# Altium PCB S11830_1.PcbDoc
Units mm, origin at the board's own origin, x right, y up, seen from the top; angles counter-clockwise.
Board outline 141.65 x 118 mm, 2 copper layers (Top Layer, Bottom Layer); 204 components, 97 nets, 506 pads, 72 vias.
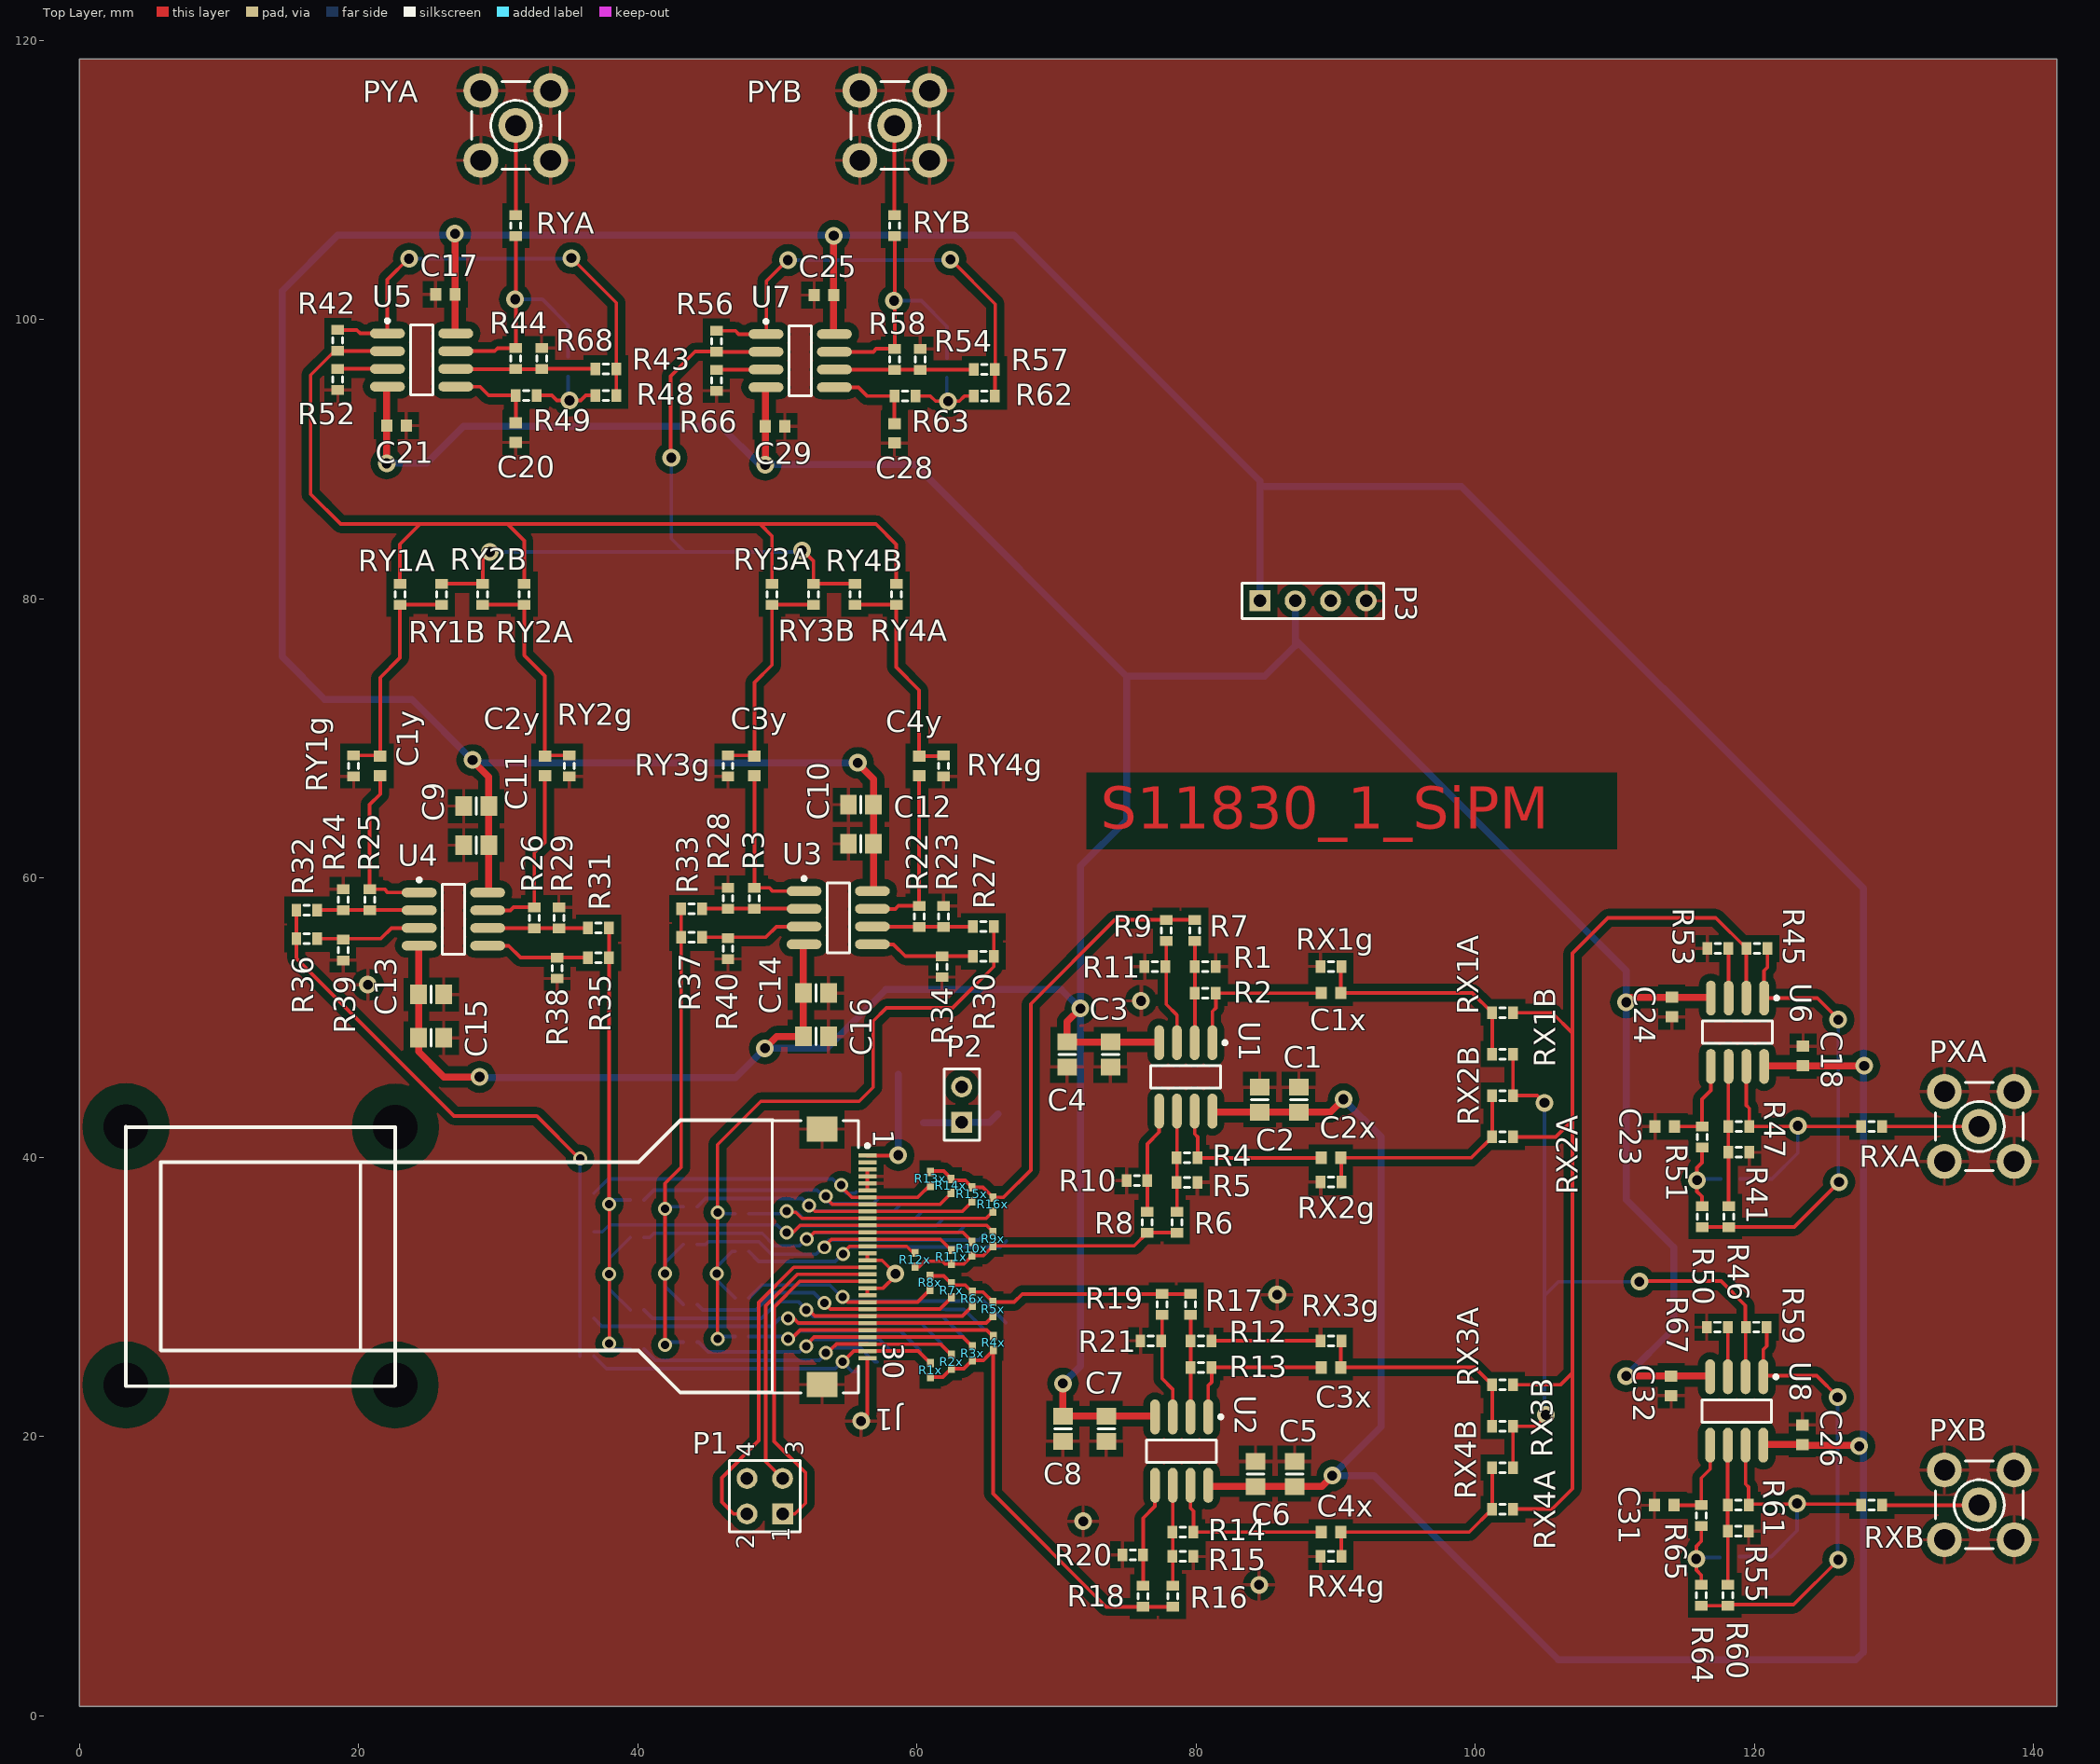
[diagram p0: Top Layer view]
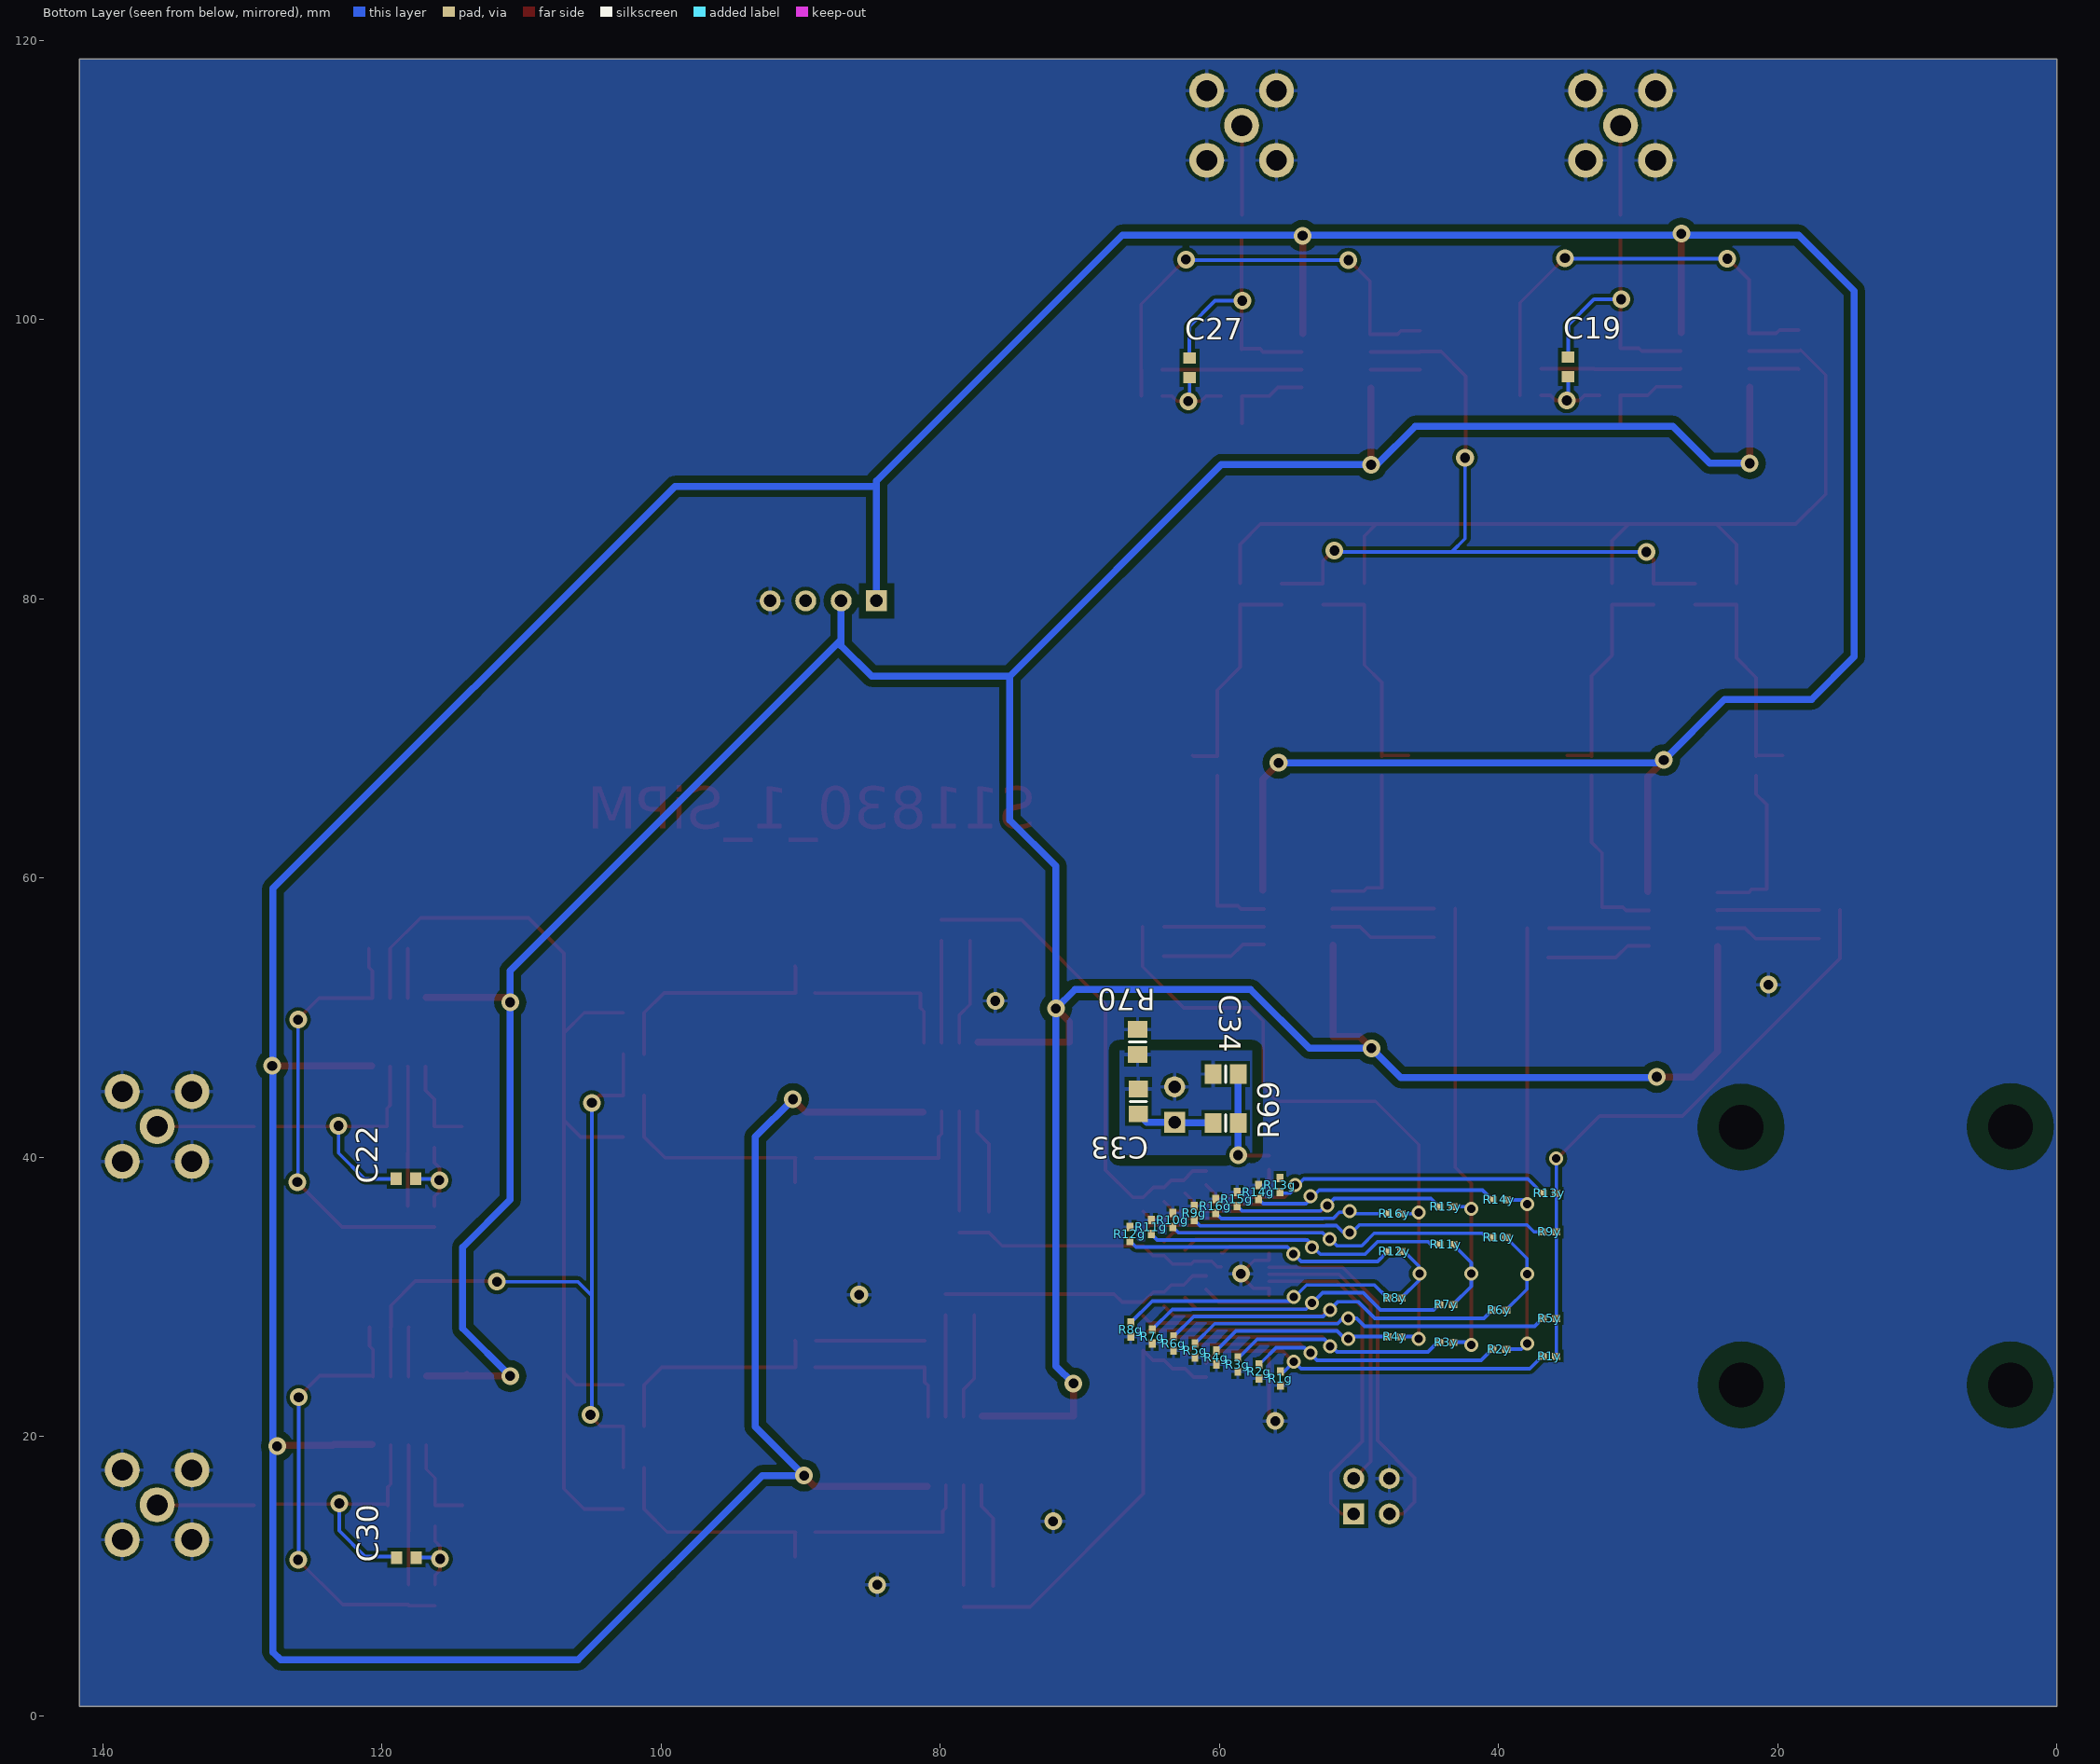
[diagram p1: Bottom Layer view, seen from below]

## Layer stack, top to bottom
Top Layer: signal copper 0.0356
Dielectric: core 0.32, FR-4, Dk 4.8
Bottom Layer: signal copper 0.0356

## Board outline
0,118.65 0,0.65 141.65,0.65 141.65,118.65 0,118.65

## Design rules (kind name [scope] priority, off if disabled: settings)
Clearance Clearance_5 [(InNamedPolygon('gnd_top') OR InNamedPolygon('gnd_bot')) vs InPadClass('Libres')] p1: gap=1.5
Clearance Clearance_4 [InNamedPolygon('gnd_top')] p2: gap=0.5
Clearance Clearance_3 [InNamedPolygon('gnd_bot') vs (InNet('-5') OR InNet('+5')OR OnLayer('Top Layer'))] p3: gap=0.5
Clearance Clearance_2 [InNamedPolygon('70_gnd_bot') vs InNamedPolygon('gnd_bot')] p4: gap=0.75
Clearance Clearance_1 [(InComponent('J1') AND (OnLayer('Bottom Layer')) OR (OnLayer('Top Layer'))OR InComponentClass('Res0402'))] p5: gap=0.2
Clearance [All] p6: gap=0.254
HoleSize HoleSize_1 [InPadClass('Libres')] p1: absolutevalues=TRUE maxlimit=5 minlimit=0.025 maxpercent=80.000 minpercent=20.000
HoleSize [All] p2: absolutevalues=TRUE maxlimit=2.54 minlimit=0.025 maxpercent=80.000 minpercent=20.000
MinimumSolderMaskSliver MinimumSolderMaskSliver_1 [(InComponentClass('Res0402') OR InComponent('J1'))] p1: minsoldermaskwidth=0.05
MinimumSolderMaskSliver [All] p2: minsoldermaskwidth=0.254
PolygonConnect [All] p1: connectstyle=Relief reliefconductorwidth=0.254 reliefentries=4 polygonreliefangle="90 Angle"
RoutingVias RoutingVias_1 [InNetClass('Undefined')] p1: holewidth=0.6 width=1 viastyle="Through Hole" minholewidth=0.6 minwidth=1 maxholewidth=0.6 maxwidth=1
RoutingVias [All] p2: holewidth=0.711 width=1.27 viastyle="Through Hole" minholewidth=0.711 minwidth=1.27 maxholewidth=0.711 maxwidth=1.27
SilkscreenOverComponentPads [All] p1: minsilkscreentomaskgap=0.254
SolderMaskExpansion SolderMaskExpansion_1 [(InComponent('J1') OR InComponentClass('Res0402')OR IsVia)] p1: expansion=0.05
SolderMaskExpansion [All] p2: expansion=0.102
Width Width_2 [InNet(GND) And OnLayer('Top Layer')] p1: maxlimit=0.254 minlimit=0.254 preferedwidth=0.254
Width Width_1 [(InNet('-5') OR InNet('+5') OR InNet('+70') OR InNet('GND')OR((InNet('+70V') AND OnLayer('Bottom Layer'))))] p2: maxlimit=0.5 minlimit=0.5 preferedwidth=0.5 minimp=50.000000 maximp=50.000000 favimp=50.000000
Width [All] p3: maxlimit=0.254 minlimit=0.254 preferedwidth=0.254
25 further rules are at their usual default settings.

## Classes and differential pairs
component class S11830_1_2: C1x C1y C2x C2y C3x C3y C4x C4y C17 C18 C19 C20 C21 C22 C23 C24 C25 C26 C27 C28 C29 C30 C31 C32 C33 C34 P1 P2 P3 PXA PXB PYA PYB R41 R42 R43 R44 R45 R46 R47 R48 R49 R50 R51 R52 R53 R54 R55 R56 R57 R58 R59 R60 R61 R62 R63 R64 R65 R66 R67 R69 R70 RX1A RX1B RX1g RX2A RX2B RX2g RX3A RX3B RX3g RX4A RX4B RX4g RXA RXB RY1A RY1B RY1g RY2A RY2B RY2g RY3A RY3B RY3g RY4A RY4B RY4g RYA RYB U5 U6 U7 U8
component class S11830_1_1: C1 C2 C3 C4 C5 C6 C7 C8 C9 C10 C11 C12 C13 C14 C15 C16 J1 R1 R1g R1x R1y R2 R2g R2x R2y R3 R3g R3x R3y R4 R4g R4x R4y R5 R5g R5x R5y R6 R6g R6x R6y R7 R7g R7x R7y R8 R8g R8x R8y R9 R9g R9x R9y R10 R10g R10x R10y R11 R11g R11x R11y R12 R12g R12x R12y R13 R13g R13x R13y R14 R14g R14x R14y R15 R15g R15x R15y R16 R16g R16x R16y R17 R18 R19 R20 R21 R22 R23 R24 R25 R26 R27 R28 R29 R30 R31 R32 R33 R34 R35 R36 R37 R38 R39 R40 U1 U2 U3 U4
net class Undefined: NetJ1_7 NetJ1_8 NetJ1_9 NetJ1_10 NetJ1_11 NetJ1_12 NetJ1_13 NetJ1_14 NetJ1_17 NetJ1_18 NetJ1_19 NetJ1_22 NetJ1_23 NetJ1_24 NetJ1_25 NetJ1_26 NetJ1_27 NetJ1_28 NetJ1_29
component class Res0402: R1g R1x R1y R2g R2x R2y R3g R3x R3y R4g R4x R4y R5g R5x R5y R6g R6x R6y R7g R7x R7y R8g R8x R8y R9g R9x R9y R10g R10x R10y R11g R11x R11y R12g R12x R12y R13g R13x R13y R14g R14x R14y R15g R15x R15y R16g R16x R16y
pad class Libres: Free-T1 Free-T2 Free-T3 Free-T4

## Components (designator, comment, footprint, x,y, rotation, side; value= is the part's Value field where it differs from the comment)
C1 "Cap" 6-0805_N 87.35,44.119 r270 top
C1x "Cap" 1608[0603] 89.65,51.765 r0 top
C1y "Cap" 1608[0603] 21.535,68.026 r90 top
C2 "Cap Pol3" 6-0805_N 84.55,44.119 r90 top
C2x "Cap" 1608[0603] 89.65,39.965 r0 top
C2y "Cap" 1608[0603] 33.335,68.026 r90 top
C3 "Cap" 6-0805_N 73.85,47.35 r90 top
C3x "Cap" 1608[0603] 89.65,24.95 r0 top
C3y "Cap" 1608[0603] 48.35,68.026 r90 top
C4 "Cap Pol3" 6-0805_N 70.75,47.35 r90 top
C4x "Cap" 1608[0603] 89.65,13.15 r0 top
C4y "Cap" 1608[0603] 60.15,68.026 r90 top
C5 "Cap" 6-0805_N 87.05,17.319 r270 top
C6 "Cap Pol3" 6-0805_N 84.25,17.319 r90 top
C7 "Cap" 6-0805_N 73.55,20.55 r90 top
C8 "Cap Pol3" 6-0805_N 70.45,20.55 r90 top
C9 "Cap" 6-0805_N 28.412,65.15 r0 top
C10 "Cap" 6-0805_N 55.981,65.25 r0 top
C11 "Cap Pol3" 6-0805_N 28.412,62.35 r180 top
C12 "Cap Pol3" 6-0805_N 55.981,62.45 r180 top
C13 "Cap" 6-0805_N 25.181,51.65 r180 top
C14 "Cap" 6-0805_N 52.75,51.75 r180 top
C15 "Cap Pol3" 6-0805_N 25.181,48.55 r180 top
C16 "Cap Pol3" 6-0805_N 52.75,48.65 r180 top
C17 "Cap" 1608[0603] 26.2,101.8 r180 top
C18 "Cap" 1608[0603] 123.475,47.25 r90 top
C19 "Cap" 1608[0603] 35,96.6 r90 bottom
C20 "Cap" 1608[0603] 31.25,91.9 r270 top
C21 "Cap" 1608[0603] 22.7,92.4 r180 top
C22 "Cap" 1608[0603] 118.275,38.45 r0 bottom
C23 "Cap" 1608[0603] 113.575,42.2 r180 top
C24 "Cap" 1608[0603] 114.075,50.75 r90 top
C25 "Cap" 1608[0603] 53.325,101.75 r180 top
C26 "Cap" 1608[0603] 123.425,20.125 r90 top
C27 "Cap" 1608[0603] 62.125,96.55 r90 bottom
C28 "Cap" 1608[0603] 58.375,91.85 r270 top
C29 "Cap" 1608[0603] 49.825,92.35 r180 top
C30 "Cap" 1608[0603] 118.225,11.325 r0 bottom
C31 "Cap" 1608[0603] 113.525,15.075 r180 top
C32 "Cap" 1608[0603] 114.025,23.625 r90 top
C33 "Cap" 6-0805_N 65.8,44 r270 bottom
C34 "Cap" 6-0805_N 59.55,45.95 r180 bottom
J1 "CL586-0556-5" FH12A-30S-0.5SH 54.816,32.869 r270 top
P1 "Header 2X2" HDR2X2 50.358,14.45 r90 top
P2 "Header 2" HDR1X2 63.2,42.5 r90 top
P3 "Header 4" HDR1X4 84.55,79.85 r0 top
PXA "SMB" SMB_V-RJ45 136.1,42.2 r0 top
PXB "SMB" SMB_V-RJ45 136.1,15.1 r0 top
PYA "SMB" SMB_V-RJ45 31.25,113.9 r0 top
PYB "SMB" SMB_V-RJ45 58.4,113.9 r0 top
R1 "Res3" J1-0603 80.65,53.65 r0 top
R1g "Res3" 0402 55.6,24.15 r90 bottom
R1x "Res3" 0402 60.95,24.75 r90 top
R1y "Res3" 0402 36.35,25.75 r0 bottom
R2 "Res3" J1-0603 80.65,51.75 r180 top
R2g "Res3" 0402 57.136,24.65 r90 bottom
R2x "Res3" 0402 62.45,25.35 r90 top
R2y "Res3" 0402 39.95,26.25 r0 bottom
R3 "Res3" J1-0603 48.35,58.55 r270 top
R3g "Res3" 0402 58.671,25.15 r90 bottom
R3x "Res3" 0402 63.95,25.95 r90 top
R3y "Res3" 0402 43.75,26.75 r0 bottom
R4 "Res3" J1-0603 79.35,38.2 r0 top
R4g "Res3" 0402 60.207,25.65 r90 bottom
R4x "Res3" 0402 65.45,26.7 r90 top
R4y "Res3" 0402 47.45,27.15 r0 bottom
R5 "Res3" J1-0603 79.35,39.95 r180 top
R5g "Res3" 0402 61.743,26.15 r90 bottom
R5x "Res3" 0402 65.441,29.119 r270 top
R5y "Res3" 0402 36.35,28.45 r0 bottom
R6 "Res3" J1-0603 78.615,35.35 r90 top
R6g "Res3" 0402 63.279,26.65 r90 bottom
R6x "Res3" 0402 63.95,29.85 r270 top
R6y "Res3" 0402 39.95,29.05 r0 bottom
R7 "Res3" J1-0603 79.9,56.25 r270 top
R7g "Res3" 0402 64.814,27.15 r90 bottom
R7x "Res3" 0402 62.45,30.45 r270 top
R7y "Res3" 0402 43.75,29.45 r0 bottom
R8 "Res3" J1-0603 76.5,35.35 r90 top
R8g "Res3" 0402 66.35,27.65 r90 bottom
R8x "Res3" 0402 60.941,31 r270 top
R8y "Res3" 0402 47.45,29.919 r0 bottom
R9 "Res3" J1-0603 77.85,56.25 r270 top
R9g "Res3" 0402 61.793,36 r270 bottom
R9x "Res3" 0402 65.441,34.15 r90 top
R9y "Res3" 0402 36.35,34.65 r0 bottom
R10 "Res3" J1-0603 75.75,38.319 r0 top
R10g "Res3" 0402 63.329,35.5 r270 bottom
R10x "Res3" 0402 63.941,33.45 r90 top
R10y "Res3" 0402 39.95,34.25 r0 bottom
R11 "Res3" J1-0603 77.05,53.65 r0 top
R11g "Res3" 0402 64.864,35 r270 bottom
R11x "Res3" 0402 62.45,32.85 r90 top
R11y "Res3" 0402 43.75,33.75 r0 bottom
R12 "Res3" J1-0603 80.35,26.85 r0 top
R12g "Res3" 0402 66.4,34.5 r270 bottom
R12x "Res3" 0402 59.85,32.65 r90 top
R12y "Res3" 0402 47.45,33.25 r0 bottom
R13 "Res3" J1-0603 80.35,24.95 r180 top
R13g "Res3" 0402 55.65,38 r270 bottom
R13x "Res3" 0402 60.95,38.45 r270 top
R13y "Res3" 0402 36.35,37.419 r180 bottom
R14 "Res3" J1-0603 79.05,11.4 r0 top
R14g "Res3" 0402 57.186,37.5 r270 bottom
R14x "Res3" 0402 62.441,37.95 r270 top
R14y "Res3" 0402 39.95,36.95 r0 bottom
R15 "Res3" J1-0603 79.05,13.15 r180 top
R15g "Res3" 0402 58.721,37 r270 bottom
R15x "Res3" 0402 63.941,37.35 r270 top
R15y "Res3" 0402 43.75,36.45 r0 bottom
R16 "Res3" J1-0603 78.315,8.55 r90 top
R16g "Res3" 0402 60.257,36.5 r270 bottom
R16x "Res3" 0402 65.441,36.619 r270 top
R16y "Res3" 0402 47.45,35.95 r0 bottom
R17 "Res3" J1-0603 79.6,29.45 r270 top
R18 "Res3" J1-0603 76.2,8.55 r90 top
R19 "Res3" J1-0603 77.55,29.45 r270 top
R20 "Res3" J1-0603 75.45,11.519 r0 top
R21 "Res3" J1-0603 76.75,26.85 r0 top
R22 "Res3" J1-0603 61.9,57.25 r90 top
R23 "Res3" J1-0603 60.15,57.25 r270 top
R24 "Res3" J1-0603 18.881,58.45 r90 top
R25 "Res3" J1-0603 20.781,58.45 r270 top
R26 "Res3" J1-0603 34.331,57.15 r90 top
R27 "Res3" J1-0603 64.75,56.515 r180 top
R28 "Res3" J1-0603 46.45,58.55 r90 top
R29 "Res3" J1-0603 32.581,57.15 r270 top
R30 "Res3" J1-0603 64.75,54.4 r180 top
R31 "Res3" J1-0603 37.181,56.415 r180 top
R32 "Res3" J1-0603 16.281,57.7 r0 top
R33 "Res3" J1-0603 43.85,57.8 r0 top
R34 "Res3" J1-0603 61.781,53.65 r90 top
R35 "Res3" J1-0603 37.181,54.3 r180 top
R36 "Res3" J1-0603 16.281,55.65 r0 top
R37 "Res3" J1-0603 43.85,55.75 r0 top
R38 "Res3" J1-0603 34.212,53.55 r90 top
R39 "Res3" J1-0603 18.881,54.85 r90 top
R40 "Res3" J1-0603 46.45,54.95 r90 top
R41 "Res3" J1-0603 118.875,40.35 r0 top
R42 "Res3" J1-0603 18.5,98.5 r270 top
R43 "Res3" J1-0603 37.7,96.465 r0 top
R44 "Res3" J1-0603 31.25,97.2 r270 top
R45 "Res3" J1-0603 120.175,54.95 r180 top
R46 "Res3" J1-0603 118.14,35.75 r270 top
R47 "Res3" J1-0603 118.875,42.2 r180 top
R48 "Res3" J1-0603 37.7,94.565 r0 top
R49 "Res3" J1-0603 32,94.565 r0 top
R50 "Res3" J1-0603 116.24,35.75 r270 top
R51 "Res3" J1-0603 116.24,41.45 r270 top
R52 "Res3" J1-0603 18.5,95.7 r270 top
R53 "Res3" J1-0603 117.375,54.95 r180 top
R54 "Res3" J1-0603 60.225,97.15 r90 top
R55 "Res3" J1-0603 118.825,13.225 r0 top
R56 "Res3" J1-0603 45.625,98.45 r270 top
R57 "Res3" J1-0603 64.825,96.415 r0 top
R58 "Res3" J1-0603 58.375,97.15 r270 top
R59 "Res3" J1-0603 120.125,27.825 r180 top
R60 "Res3" J1-0603 118.09,8.625 r270 top
R61 "Res3" J1-0603 118.825,15.075 r180 top
R62 "Res3" J1-0603 64.825,94.515 r0 top
R63 "Res3" J1-0603 59.125,94.515 r0 top
R64 "Res3" J1-0603 116.19,8.625 r270 top
R65 "Res3" J1-0603 116.19,14.325 r270 top
R66 "Res3" J1-0603 45.625,95.65 r270 top
R67 "Res3" J1-0603 117.325,27.825 r180 top
R68 "Res3" J1-0603 33.1,97.2 r90 top
R69 "Res3" 6-0805_N 59.55,42.45 r0 bottom
R70 "Res3" 6-0805_N 65.85,48.25 r270 bottom
RX1A "Res3" J1-0603 101.95,50.35 r180 top
RX1B "Res3" J1-0603 101.95,47.383 r180 top
RX1g "Res3" J1-0603 89.65,53.665 r0 top
RX2A "Res3" J1-0603 101.95,41.45 r180 top
RX2B "Res3" J1-0603 101.95,44.417 r180 top
RX2g "Res3" J1-0603 89.65,38.215 r0 top
RX3A "Res3" J1-0603 101.95,23.695 r180 top
RX3B "Res3" J1-0603 101.95,20.728 r180 top
RX3g "Res3" J1-0603 89.65,26.85 r0 top
RX4A "Res3" J1-0603 101.95,14.795 r180 top
RX4B "Res3" J1-0603 101.95,17.762 r180 top
RX4g "Res3" J1-0603 89.65,11.4 r0 top
RXA "Res3" J1-0603 128.4,42.2 r180 top
RXB "Res3" J1-0603 128.4,15.075 r180 top
RY1A "Res3" J1-0603 22.95,80.326 r270 top
RY1B "Res3" J1-0603 25.917,80.326 r270 top
RY1g "Res3" J1-0603 19.635,68.026 r90 top
RY2A "Res3" J1-0603 31.85,80.326 r270 top
RY2B "Res3" J1-0603 28.883,80.326 r270 top
RY2g "Res3" J1-0603 35.085,68.026 r90 top
RY3A "Res3" J1-0603 49.605,80.326 r270 top
RY3B "Res3" J1-0603 52.572,80.326 r270 top
RY3g "Res3" J1-0603 46.45,68.026 r90 top
RY4A "Res3" J1-0603 58.505,80.326 r270 top
RY4B "Res3" J1-0603 55.538,80.326 r270 top
RY4g "Res3" J1-0603 61.9,68.026 r90 top
RYA "Res3" J1-0603 31.25,106.725 r270 top
RYB "Res3" J1-0603 58.375,106.725 r270 top
U1 "AD8002" SO-8_M 79.25,45.75 r270 top
U2 "AD8002" SO-8_M 78.95,18.95 r270 top
U3 "AD8002" SO-8_M 54.35,57.15 r0 top (schematic designator U1)
U4 "AD8002" SO-8_M 26.781,57.05 r0 top
U5 "AD8056ARM" SO8_M 24.5,97.1 r0 top
U6 "AD8056ARM" SO8_M 118.775,48.95 r270 top
U7 "AD8056ARM" SO8_M 51.625,97.05 r0 top
U8 "AD8056ARM" SO8_M 118.725,21.825 r270 top

## Footprints (in the part's own frame and the unit in brackets; to place one, negate y for a bottom-side part, rotate by r counter-clockwise, add the part's x,y. Pads: shape width x height; smd on the part's side, far side on the other; paste and mask are expansions set on the pad)
6-0805_N [mm] "Chip Resistor, Body 2.0x1.2mm, IPC Medium Density"
  rect 1.2x1.4 smd: 1(-0.9,0) 2(0.9,0)
  silkscreen extent 0,-0.6 0,0.6, body extent -1.07,-0.7 1.07,0.7, height 0.7
0402 [mm] "Chip Capacitor, Body 1.0x0.5mm, IPC High Density"
  rect 0.6x0.5 smd: 1(-0.5,0) 2(0.5,0)
  body extent -0.55,-0.3 0.55,0.3, height 1.3
1608[0603] [mm] "Chip Capacitor, Body 1.6x0.8mm, IPC High Density"
  rect 0.8x0.9 smd: 1(-0.7,0) 2(0.7,0)
  body extent -0.87,-0.48 0.87,0.48, height 1.3
FH12A-30S-0.5SH [mm] "Connector; FH12 Series; 30 Position; 0.5mm Spaced Top Contact"
  rect 0.3x1.3 smd: 1(-7.25,1.625) 2(-6.75,1.625) 3(-6.25,1.625) 4(-5.75,1.625) 5(-5.25,1.625) 6(-4.75,1.625) 7(-4.25,1.625) 8(-3.75,1.625) 9(-3.25,1.625) 10(-2.75,1.625) 11(-2.25,1.625) 12(-1.75,1.625) 13(-1.25,1.625) 14(-0.75,1.625) 15(-0.25,1.625) 16(0.25,1.625) 17(0.75,1.625) 18(1.25,1.625) 19(1.75,1.625) 20(2.25,1.625) 21(2.75,1.625) 22(3.25,1.625) 23(3.75,1.625) 24(4.25,1.625) 25(4.75,1.625) 26(5.25,1.625) 27(5.75,1.625) 28(6.25,1.625) 29(6.75,1.625) 30(7.25,1.625)
  rect 1.8x2.2 smd: 31(-9.15,-1.625) 32(9.15,-1.625)
  silkscreen extent -9.75,-5.2 9.75,1.75
HDR1X2 [mm] "Connector; Header; 2 Position"
  rect 1.5x1.5 hole 0.9: 1(0,0)
  round 1.5 hole 0.9: 2(2.54,0)
  silkscreen extent -1.27,-1.27 3.81,1.27
HDR1X4 [mm] "Connector; Header; 4 Position"
  rect 1.5x1.5 hole 0.9: 1(0,0)
  round 1.5 hole 0.9: 2(2.54,0) 3(5.08,0) 4(7.62,0)
  silkscreen extent -1.27,-1.27 8.89,1.27
HDR2X2 [mm] "Connector; Header; 2x2 Position"
  rect 1.5x1.5 hole 0.9: 1(0,0)
  round 1.5 hole 0.9: 2(0,2.54) 3(2.54,0) 4(2.54,2.54)
  silkscreen extent -1.27,-1.27 3.81,3.81
J1-0603 [mm] "Chip Resistor, Body 1.6x0.8mm, IPC High Density"
  rect 0.7x0.9 smd: 1(-0.75,0) 2(0.75,0)
  silkscreen extent -0.2,-0.35 0.2,0.35, body extent -0.85,-0.48 0.85,0.48, height 0.9
SMB_V-RJ45 [mm] "Connector; SMB Straight"
  round 2.5 hole 1.5: 1(0,0) 2(-2.5,-2.5) 2(-2.5,2.5) 2(2.5,-2.5) 2(2.5,2.5)
  silkscreen extent -3.15,-3.15 3.15,3.15
SO8_M [mm] "SOIC, 8-Leads, Body 4.9x3.9mm, Pitch 1.27mm, IPC Low Density"
  oval 2.5x0.7 smd: 1(-2.45,1.905) 2(-2.45,0.635) 3(-2.45,-0.635) 4(-2.45,-1.905) 5(2.45,-1.905) 6(2.45,-0.635) 7(2.45,0.635) 8(2.45,1.905)
  silkscreen extent -2.57,-2.5 0.8,2.93, body extent -2,-2.5 2,2.5, height 1.75
SO-8_M [mm] "SOIC, 8-Leads, Body 4.9x3.9mm, Pitch 1.27mm, IPC Low Density"
  oval 2.5x0.7 smd: 1(-2.45,1.905) 2(-2.45,0.635) 3(-2.45,-0.635) 4(-2.45,-1.905) 5(2.45,-1.905) 6(2.45,-0.635) 7(2.45,0.635) 8(2.45,1.905)
  silkscreen extent -2.57,-2.5 0.8,2.93, body extent -2,-2.5 2,2.5, height 1.75

## Part data
C1 C1x C1y C2x C2y C3 C3x C3y C4x C4y C5 C7 C9 C10 C13 C14 C17 C18 C19 C20 C21 C22 C23 C24 C25 C26 C27 C28 C29 C30 C31 C32 C33 C34: "Capacitor"
C2 C4 C6 C8 C11 C12 C15 C16: "Polarized Capacitor (Surface Mount)"
J1: "FH12 Series, \"Flip-Lock\" SMT/ZIF FFC/FPC Connector - 0.5mm Spaced Top Contact"
P1: "Header, 2-Pin, Dual row"
P2: "Header, 2-Pin"
P3: "Header, 4-Pin"
PXA PXB PYA PYB: "SMB Straight Connector"
R1 R1g R1x R1y R2 R2g R2x R2y R3 R3g R3x R3y R4 R4g R4x R4y R5 R5g R5x R5y R6 R6g R6x R6y R7 R7g R7x R7y R8 R8g R8x R8y R9 R9g R9x R9y R10 R10g R10x R10y R11 R11g R11x R11y R12 R12g R12x R12y R13 R13g R13x R13y R14 R14g R14x R14y R15 R15g R15x R15y R16 R16g R16x R16y R17 R18 R19 R20 R21 R22 R23 R24 R25 R26 R27 R28 R29 R30 R31 R32 R33 R34 R35 R36 R37 R38 R39 R40 R41 R42 R43 R44 R45 R46 R47 R48 R49 R50 R51 R52 R53 R54 R55 R56 R57 R58 R59 R60 R61 R62 R63 R64 R65 R66 R67 R68 R69 R70 RX1A RX1B RX1g RX2A RX2B RX2g RX3A RX3B RX3g RX4A RX4B RX4g RXA RXB RY1A RY1B RY1g RY2A RY2B RY2g RY3A RY3B RY3g RY4A RY4B RY4g RYA RYB: "Resistor"
U1 U2 U3 U4: library part AD8002AR, "Dual 600MHz, 50mW Current Feedback Amplifier"
U5 U6 U7 U8: "Low Cost, 300MHz Voltage Feedback Amplifier"

## Free pads (board coordinates)
  round 1.524 hole 3.2 unplated: T1(22.6,23.685) T2(22.616,42.15) T3(3.316,42.185) T4(3.316,23.685)

## Via types
v1: diameter 1.27, hole 0.711, Top Layer to Bottom Layer, 46 vias
v2: diameter 1, hole 0.6, Top Layer to Bottom Layer, 26 vias

## Nets (pads, with @x,y where several pads share a name; then routed paths per layer and width w, separated by ;. In a path a pad name is that pad's centre, name@x,y a point inside that pad or via, vN(x,y) a via of type N, cw(c..) or ccw(c..) an arc to the next point about the centre after c; other vN are vias at no path point)
70_GND: C33.1 C34.1 P2.2 R70.2
+5: C1.2 C2.1 C5.2 C6.1 C9.2 C10.2 C11.1 C12.1 C17.1 C18.1 C25.1 C26.1 P3.1 U1.8 U2.8 U3.8 U4.8 U5.8 U6.8 U7.8 U8.8 | length 407.2
  Top Layer w0.5: U5.8@26.9,99.055 C17.1 v1@26.9,106.1 ; v1@28.15,68.4 29.312,67.238 C9.2 C11.1 U4.8@29.312,59.036 ; U7.8@54.025,99.005 C25.1 v1(54.025,106) ; v1@55.75,68.2 56.881,67.069 C10.2 C12.1 U3.8@56.881,59.136 ; U2.8@80.936,16.419 C6.1 C5.2 89.019,16.419 v1@89.75,17.15 ; U1.8@81.236,43.219 C2.1 C1.2 89.619,43.219 v1(90.55,44.15) ; U8.8@120.68,19.425 C26.1 123.49,19.36 v1@127.15,19.36 ; U6.8@120.73,46.55 C18.1 v1(127.85,46.55)
  Bottom Layer w0.5: v1(55.75,68.25) 28.35,68.25 23.8,72.8 17.55,72.8 14.5,75.85 14.5,102.05 18.5,106.05 66.95,106.05 84.55,88.45 84.55,88.05 ; P3.1 84.55,88.05 ; v1(90.55,44.15) 93.25,41.45 93.25,20.7 v1(89.75,17.2) 92.75,17.2 105.95,4 127.25,4 127.8,4.55 127.8,59.25 99,88.05 84.55,88.05
  other v1: 127.5,19.3 28.15,68.45 26.9,106.15
+70: C33.2 P2.1 R69.2 | length 5.5
  Bottom Layer w0.5: R69.2 P2.1@63.15,42.45 ; P2.1 65.2,42.5 C33.2
+70V: C34.2 J1.1 R69.1 | length 8
  Top Layer w0.254: J1.1 58.619,40.119 v1(58.65,40.15)
  Bottom Layer w0.5: v1(58.65,40.15) R69.1 C34.2
-5: C3.2 C4.2 C7.2 C8.2 C13.2 C14.2 C15.2 C16.2 C21.2 C24.2 C29.2 C32.2 P3.2 U1.4 U2.4 U3.4 U4.4 U5.4 U6.4 U7.4 U8.4 | length 306.1
  Top Layer w0.5: v1@22,89.6 C21.2 U5.4@22,95.145 ; U4.4@24.281,55.095 C13.2 C15.2 24.281,47.579 26.109,45.75 v1(28.65,45.75) ; v1(49.1,47.8) 49.95,48.65 C16.2 C14.2 U3.4@51.85,55.195 ; v1@49.125,89.55 v1(49.125,89.6) C29.2 U7.4@49.125,95.095 ; v1@70.45,23.75 C8.2 C7.2 U2.4@76.995,21.45 ; v1(71.7,50.65) 70.75,49.7 C4.2 C3.2 U1.4@77.295,48.25 ; v1(110.8,24.325) C32.2 ; v1(110.8,51.1) 110.8,51.45 C24.2 U6.4@116.82,51.45 ; C32.2@113.9,24.45 C32.2 ; U8.4@116.77,24.325 C32.2
  Bottom Layer w0.5: v1(22,89.7) 24.85,89.7 27.5,92.35 45.95,92.35 48.7,89.6 v1(49.125,89.6) 59.85,89.6 75,74.45 ; v1@28.5,45.85 28.55,45.85 28.7,45.7 47,45.7 v1(49.1,47.8) 53.55,47.8 57.75,52 70.35,52 v1(71.7,50.65) ; v1(70.45,23.8) 71.7,25.05 v1(71.7,50.65) ; P3.2 87.09,77.05 ; v1(110.8,24.325) 114.2,27.725 114.2,33.55 110.8,36.95 v1(110.8,51.1) 110.8,53.34 87.09,77.05 ; v1(71.7,50.65) 71.7,60.85 75,64.15 75,74.45 ; 75,74.45 84.9,74.45 87.09,76.64 87.09,77.05
GND: C1.1 C2.2 C3.1 C4.1 C5.1 C6.2 C7.1 C8.1 C9.1 C10.1 C11.2 C12.2 C13.1 C14.1 C15.1 C16.1 C17.2 C18.2 C20.2 C21.1 C23.2 C24.1 C25.2 C26.2 C28.2 C29.1 C31.2 C32.1 J1.3 J1.4 J1.5 J1.6 J1.15 J1.16 J1.20 J1.21 J1.30 J1.31 J1.32 P1.4 P3.4 PXA.2 PXB.2 PYA.2 PYB.2 R1.2 R1g.1 R2g.1 R3g.1 R4.2 R4g.1 R5g.1 R6g.1 R7g.1 R8g.1 R9g.1 R10.1 R10g.1 R11.1 R11g.1 R12.2 R12g.1 R14.2 R14g.1 R15g.1 R16g.1 R20.1 R21.1 R22.2 R24.2 R26.2 R28.2 R34.1 R38.1 R39.1 R40.1 R41.2 R52.2 R53.2 R54.2 R55.2 R66.2 R67.2 R68.2 R70.1 RX1g.1 RX2g.1 RX3g.1 RX4g.1 RY1g.1 RY2g.1 RY3g.1 RY4g.1 | length 19.9
  Top Layer w0.254: v1(55.989,21.1) 56.441,21.552 J1.30 ; J1.21 J1.20 57.569,30.619 58.45,31.5 v1(58.45,31.65) 57.481,32.619 J1.16 J1.15 ; J1.6 J1.5 J1.4 J1.3 ; R12.2 RX3g.1
  other v1: 84.5,9.375 71.9,13.922 85.8,30.15 76.048,51.2 20.65,52.35
NetC1x_1: C1x.1 R2.1 U1.1 | length 11.2
  Top Layer w0.254: U1.1 81.155,50.45 81.4,50.695 R2.1 88.935,51.75 C1x.1
NetC1x_2: C1x.2 RX1A.2 RX1B.2 RX1g.2 | length 16.3
  Top Layer w0.254: RX1g.2 90.35,53.615 C1x.2 99.785,51.765 RX1A.2 RX1B.2
NetC1y_1: C1y.1 R25.1 U4.1 | length 12.1
  Top Layer w0.254: C1y.1 21.535,66.01 20.781,65.256 R25.1 21.836,59.2 22.081,58.955 U4.1
NetC1y_2: C1y.2 RY1A.2 RY1B.2 RY1g.2 | length 16.3
  Top Layer w0.254: RY1g.2 C1y.2@21.485,68.776 ; C1y.2 21.535,74.35 22.95,75.765 RY1A.2 RY1B.2
NetC2x_1: C2x.1 R5.1 U1.7 | length 12.3
  Top Layer w0.254: U1.7 79.885,41.665 80.1,41.45 R5.1 C2x.1@88.935,39.95
NetC2x_2: C2x.2 RX2A.2 RX2B.2 RX2g.2 | length 16.2
  Top Layer w0.254: RX2g.2 90.4,39.915 C2x.2 99.715,39.965 RX2A.2 RX2B.2
NetC2y_1: C2y.1 R29.1 U4.7 | length 13.2
  Top Layer w0.254: U4.7 30.866,57.685 31.081,57.9 R29.1 32.581,61.8 33.335,62.554 C2y.1
NetC2y_2: C2y.2 RY2A.2 RY2B.2 RY2g.2 | length 16.2
  Top Layer w0.254: RY2B.2 RY2A.2 31.85,75.95 33.335,74.465 C2y.2 33.385,68.776 RY2g.2
NetC3x_1: C3x.1 R13.1 U2.1 | length 11.5
  Top Layer w0.254: U2.1 80.855,23.65 81.1,23.895 R13.1 C3x.1
NetC3x_2: C3x.2 RX3A.2 RX3B.2 RX3g.2 | length 16.3
  Top Layer w0.254: RX3g.2 90.35,26.8 C3x.2 99.945,24.95 RX3A.2 RX3B.2
NetC3y_1: C3y.1 R3.1 U3.1 | length 11.7
  Top Layer w0.254: C3y.1 R3.1 49.405,59.3 49.65,59.055 U3.1
NetC3y_2: C3y.2 RY3A.2 RY3B.2 RY3g.2 | length 16.2
  Top Layer w0.254: RY3g.2 C3y.2@48.3,68.776 ; C3y.2 48.35,74 49.605,75.255 RY3A.2 RY3B.2
NetC4x_1: C4x.1 R15.1 U2.7 | length 12.6
  Top Layer w0.254: U2.7 79.585,14.865 79.8,14.65 R15.1 C4x.1
NetC4x_2: C4x.2 RX4A.2 RX4B.2 RX4g.2 | length 16.3
  Top Layer w0.254: RX4g.2 90.4,13.1 C4x.2 99.555,13.15 RX4A.2 RX4B.2
NetC4y_1: C4y.1 R23.1 U3.7 | length 12.8
  Top Layer w0.254: U3.7 58.435,57.785 58.65,58 R23.1 C4y.1
NetC4y_2: C4y.2 RY4A.2 RY4B.2 RY4g.2 | length 16.3
  Top Layer w0.254: RY4B.2 RY4A.2 58.505,75.095 60.15,73.45 C4y.2 61.85,68.726 RY4g.2
NetC19_1: C19.1 R48.1 R49.2 | length 6.1
  Top Layer w0.254: R49.2 33.835,94.565 34.2,94.2 v1(35.1,94.2) 35.9,94.2 36.265,94.565 R48.1
  Bottom Layer w0.254: v1@35,94.3 C19.1
NetC19_2: C19.2 R44.1 RYA.2 U5.7 | length 19.3
  Top Layer w0.254: U5.7 29.735,97.735 29.95,97.95 R44.1 ; R44.1@31.25,97.975 RYA.2@31.25,106
  Bottom Layer w0.254: v1(31.2,101.45) 33.15,101.45 35,99.6 C19.2@35,97.325
NetC20_1: C20.1 R49.1 U5.5 | length 6.5
  Top Layer w0.254: U5.5 28.67,95.195 29.3,94.565 R49.1 C20.1
NetC22_1: C22.1 R50.1 R51.2 | length 6.1
  Top Layer w0.254: R50.1 116.24,37.185 115.875,37.55 v1(115.875,38.35) 115.875,39.25 116.24,39.615 R51.2
  Bottom Layer w0.254: v1@115.975,38.45 C22.1
NetC22_2: C22.2 R47.1 RXA.2 U6.7 | length 19.3
  Top Layer w0.254: U6.7 119.41,43.715 119.625,43.5 R47.1 RXA.2
  Bottom Layer w0.254: C22.2 121.25,38.45 123.1,40.3 v1(123.1,42.25)
NetC23_1: C23.1 R51.1 U6.5 | length 6.5
  Top Layer w0.254: C23.1 R51.1 116.24,44.15 116.87,44.78 U6.5
NetC27_1: C27.1 R62.1 R63.2 | length 6.1
  Top Layer w0.254: R63.2 60.96,94.515 61.325,94.15 v1(62.225,94.15) 63.025,94.15 63.39,94.515 R62.1
  Bottom Layer w0.254: v1@62.125,94.25 C27.1
NetC27_2: C27.2 R58.1 RYB.2 U7.7 | length 19.3
  Top Layer w0.254: U7.7 56.86,97.685 57.075,97.9 R58.1 ; R58.1@58.4,97.875 RYB.2@58.4,105.9
  Bottom Layer w0.254: v1(58.35,101.35) 60.3,101.35 62.15,99.5 C27.2@62.15,97.225
NetC28_1: C28.1 R63.1 U7.5 | length 6.5
  Top Layer w0.254: U7.5 55.795,95.145 56.425,94.515 R63.1 C28.1
NetC30_1: C30.1 R64.1 R65.2 | length 6.1
  Top Layer w0.254: R64.1 116.19,10.06 115.825,10.425 v1(115.825,11.225) 115.825,12.125 116.19,12.49 R65.2
  Bottom Layer w0.254: v1@115.925,11.325 C30.1
NetC30_2: C30.2 R61.1 RXB.2 U8.7 | length 19.3
  Top Layer w0.254: U8.7 119.36,16.59 119.575,16.375 R61.1 ; R61.1@119.575,15.15 RXB.2@127.6,15.15
  Bottom Layer w0.254: C30.2@118.925,11.4 121.2,11.4 123.05,13.25 v1(123.05,15.2)
NetC31_1: C31.1 R65.1 U8.5 | length 6.5
  Top Layer w0.254: C31.1 R65.1 116.19,17.025 116.82,17.655 U8.5
NetJ1_7: J1.7 R13g.2 R13x.2 R13y.1 | length 27
  Top Layer w0.254: v2(54.569,38.019) 54.5,37.95 55.331,37.119 J1.7 60.041,37.119 R13x.2@60.941,38.019
  Bottom Layer w0.254: R13y.1 37.881,38.45 53.95,38.45 54.45,37.95 54.45,37.9 54.931,37.419 55.569,37.419 R13g.2
NetJ1_8: J1.8 R14g.2 R14x.2 R14y.2 | length 26.9
  Top Layer w0.254: v2@53.378,36.922 53.628,36.922 53.931,36.619 J1.8 61.641,36.619 R14x.2@62.441,37.419
  Bottom Layer w0.254: R14y.2 41.15,37.65 52.84,37.65 v2@53.416,37.074 ; v2@53.46,36.84 53.61,36.84 53.781,36.669 56.855,36.669 R14g.2
  other v2: 53.45,37.2
NetJ1_9: J1.9 R15g.2 R15x.2 R15y.2 | length 27.5
  Top Layer w0.254: v2(52.25,36.554) 52.25,36.55 52.2,36.5 52.25,36.45 52.35,36.45 52.681,36.119 J1.9 63.241,36.119 R15x.2@63.941,36.819
  Bottom Layer w0.254: R15y.2 44.831,37.031 51.769,37.031 52.35,36.45 52.45,36.45 52.739,36.161 58.382,36.161 R15g.2
NetJ1_10: J1.10 R16g.2 R16x.2 R16y.2 | length 28.1
  Top Layer w0.254: v2(50.65,36.15) 50.75,36.05 51.307,36.05 51.738,35.619 J1.10 64.941,35.619 R16x.2
  Bottom Layer w0.254: R16y.2 v2@50.85,35.95 ; v2(50.65,36.15) 50.75,36.05 51.404,36.05 51.835,35.619 52.565,35.619 52.584,35.6 59.857,35.6 R16g.2
NetJ1_11: J1.11 R9g.2 R9x.2 R9y.2 | length 40.4
  Top Layer w0.254: 51.15,34.65 51.619,35.119 J1.11 64.981,35.119 R9x.2@65.45,34.65
  Bottom Layer w0.254: R9y.2 37.45,34.65 37.95,35.15 49.95,35.15 50.45,34.65 51.15,34.65 51.611,35.111 52.355,35.111 52.374,35.092 61.385,35.092 R9g.2
  other v2: 50.65,34.6
NetJ1_12: J1.12 R10g.2 R10x.2 R10y.2 | length 36.5
  Top Layer w0.254: v2(52.1,34.146) 52.146,34.146 52.619,34.619 J1.12 63.281,34.619 R10x.2@63.95,33.95
  Bottom Layer w0.254: R10y.2 40.85,34.25 41.15,34.55 48.9,34.55 49.8,33.65 51.55,33.65 52.15,34.25 v2@52.25,34.25 ; v2(52.1,34.146) 52.146,34.146 v2@52.25,34.25 ; R10g.2 62.913,34.584 52.584,34.584 v2@52.25,34.25
NetJ1_13: J1.13 R11g.2 R11x.2 R11y.2 | length 31.5
  Top Layer w0.254: v2@53.35,33.75 53.493,33.75 53.862,34.119 J1.13 61.681,34.119 R11x.2
  Bottom Layer w0.254: R11y.2 44.85,33.75 45.05,33.95 48.65,33.95 49.55,33.05 52.75,33.05 53.35,33.65 v2@53.35,33.75 ; v2@53.196,33.596 v2@53.35,33.75 ; R11g.2 64.44,34.076 53.676,34.076 v2@53.35,33.75
  other v2: 53.378,33.55
NetJ1_14: J1.14 R12g.2 R12x.2 R12y.2 | length 25.8
  Top Layer w0.254: v2@54.45,33.25 54.45,32.9 55.169,33.619 J1.14 59.25,33.619 59.719,33.15 R12x.2
  Bottom Layer w0.254: R12y.2 48.658,32.542 54.125,32.542 54.395,32.812 v2@54.395,33.25 ; v2@54.45,33.25 54.8,33.25 55.118,33.568 65.968,33.568 R12g.2
  other v2: 54.7,33.059
NetJ1_17: J1.17 P1.2 | length 26.4
  Top Layer w0.254: P1.2 46.858,14.45 46.008,15.3 46.008,17.05 48.658,19.7 48.658,29.6 ; 48.654,29.604 51.169,32.119 J1.17
NetJ1_18: J1.18 P1.3 | length 21.1
  Top Layer w0.254: P1.3 49.158,18.19 49.158,29.369 51.419,31.619 J1.18
NetJ1_19: J1.19 P1.1 | length 24.4
  Top Layer w0.254: 49.746,29.254 51.611,31.119 J1.19 ; 49.758,29.25 49.758,19.65 52.008,17.4 52.008,15.219 51.239,14.45 P1.1
NetJ1_22: J1.22 R8g.2 R8x.2 R8y.2 | length 27
  Top Layer w0.254: v2(54.65,30) 55.031,29.619 J1.22 60.041,29.619 R8x.2@60.941,30.519
  Bottom Layer w0.254: R8y.2 48.881,30.85 53.75,30.85 54.9,29.7 64.8,29.7 R8g.2 ; v2@54.7,29.919 v2@54.919,29.7
NetJ1_23: J1.23 R7g.2 R7x.2 R7y.2 | length 32.1
  Top Layer w0.254: v2(53.35,29.55) 53.781,29.119 J1.23 61.641,29.119 R7x.2@62.441,29.919
  Bottom Layer w0.254: R7y.2 44.65,29.05 48.45,29.05 49.7,30.3 52.6,30.3 v2@53.442,29.458 ; v2(53.35,29.55) 53.35,29.534 53.776,29.108 62.039,29.108 62.047,29.1 63.364,29.1 R7g.2
NetJ1_24: J1.24 R6g.2 R6x.2 R6y.2 | length 36.8
  Top Layer w0.254: v2@52.25,29.05 52.681,28.619 J1.24 63.241,28.619 R6x.2@63.941,29.319
  Bottom Layer w0.254: R6y.2 41.05,28.45 48.85,28.45 50.05,29.65 51.5,29.65 52.55,28.6 61.829,28.6 R6g.2
  other v2: 52.055,29.05
NetJ1_25: J1.25 R5g.2 R5x.2 R5y.2 | length 40.7
  Top Layer w0.254: v2@51.15,28.45 51.481,28.119 J1.25 64.941,28.119 R5x.2
  Bottom Layer w0.254: R5y.2 37.4,27.9 49.6,27.9 50.15,28.45 51.15,28.45 51.527,28.073 60.32,28.073 R5g.2
  other v2: 50.755,28.45
NetJ1_26: J1.26 R4g.2 R4x.2 R4y.2 | length 28.2
  Top Layer w0.254: v2(50.75,26.995) 50.995,26.995 51.619,27.619 J1.26 64.981,27.619 R4x.2@65.45,27.15
  Bottom Layer w0.254: R4y.2 51.15,27.15 51.55,27.55 58.807,27.55 R4g.2
NetJ1_27: J1.27 R3g.2 R3x.2 R3y.2 | length 27.9
  Top Layer w0.254: v2@52.2,26.6 52.2,26.7 52.619,27.119 J1.27 63.281,27.119 R3x.2
  Bottom Layer w0.254: R3y.2 44.35,26.75 45.05,26.05 51.55,26.05 52.45,26.95 57.289,26.95 58.589,25.65 R3g.2
  other v2: 52.055,26.45
NetJ1_28: J1.28 R2g.2 R2x.2 R2y.2 | length 27.4
  Top Layer w0.254: v2@53.35,26.25 53.85,26.25 54.219,26.619 J1.28 56.46,26.6 61.7,26.6 R2x.2
  Bottom Layer w0.254: R2y.2 41.25,25.45 52.996,25.45 53.896,26.35 55.936,26.35 56.948,25.337 R2g.2@57.136,25.337
  other v2: 53.45,26
NetJ1_29: J1.29 R1g.2 R1x.2 R1y.2 | length 26.6
  Top Layer w0.254: v2(54.65,25.35) 54.7,25.35 55.469,26.119 J1.29 60.081,26.119 R1x.2
  Bottom Layer w0.254: R1y.2 37.75,24.85 54.15,24.85 v2(54.65,25.35) 55.35,24.65 R1g.2
NetPXA_1: PXA.1 RXA.1 | length 6.9
  Top Layer w0.254: RXA.1 PXA.1
NetPXB_1: PXB.1 RXB.1 | length 6.9
  Top Layer w0.254: RXB.1 PXB.1@136.075,15.075
NetPYA_1: PYA.1 RYA.1 | length 6.4
  Top Layer w0.254: RYA.1 PYA.1
NetPYB_1: PYB.1 RYB.1 | length 6.4
  Top Layer w0.254: RYB.1 PYB.1@58.375,113.875
NetR1_1: R1.1 R2.2 R7.2 U1.2 | length 7.3
  Top Layer w0.254: U1.2 79.9,48.215 R7.2
NetR1x_1: R1x.1 R2x.1 R3x.1 R4x.1 R16.1 R18.1 | length 31.8
  Top Layer w0.254: R1x.1 61.85,24.25 R2x.1 63.35,24.85 R3x.1 64.75,25.45 65.45,26.15 65.45,15.9 73.55,7.8 R18.1 R16.1
NetR1y_1: R1y.1 R5y.1 R9y.1 R13y.2 R32.1 R36.1 | length 43.9
  Top Layer w0.254: R32.1 R36.1 15.531,54.24 26.821,42.95 32.75,42.95 v2@35.85,39.85
  Bottom Layer w0.254: R1y.1 R5y.1 R9y.1 R13y.2 v2(35.85,39.9)
NetR2y_1: R2y.1 R6y.1 R10y.1 R14y.1 R31.1 R35.1 | length 39.5
  Top Layer w0.254: v2@37.931,36.669 R35.1 R31.1 ; v2(37.95,26.65) v2(37.95,31.619) v2(37.95,36.65)
  Bottom Layer w0.254: v2(37.95,26.65) 38.35,26.25 R2y.1 ; v2(37.95,36.65) 38.25,36.95 R14y.1 ; R6y.1 37.95,30.55 v2(37.95,31.619) 37.95,32.75 R10y.1
NetR3_2: R3.2 R28.1 R33.2 U3.2 | length 7.3
  Top Layer w0.254: R33.2 51.885,57.8 U3.2
NetR3y_1: R3y.1 R7y.1 R11y.1 R15y.1 R33.1 R37.1 | length 39.9
  Top Layer w0.254: v2(41.95,26.55) v2(41.95,31.65) 41.95,36.25 41.95,38.125 43.1,39.275 R37.1 R33.1
  Bottom Layer w0.254: v2(41.95,26.55) 42.15,26.75 R3y.1 ; v2@41.95,36.25 42.15,36.45 R15y.1 ; R7y.1 41.95,30.75 v2(41.95,31.65) 41.95,32.45 R11y.1
  other v2: 41.95,36.3
NetR4_1: R4.1 R5.2 R6.2 U1.6 | length 7.2
  Top Layer w0.254: R6.2@78.615,36.15 78.615,39.95 U1.6
NetR4y_1: R4y.1 R8y.1 R12y.1 R16y.1 R27.1 R30.1 | length 51.8
  Top Layer w0.254: v2(45.7,27) 45.7,35.95 45.7,40.9 48.8,44 55.85,44 56.85,45 56.85,49.75 57.795,50.695 62.545,50.695 65.5,53.65 R30.1 R27.1
  Bottom Layer w0.254: v2(45.7,27) 45.85,27.15 R4y.1 ; v2(45.7,36.05) 45.7,35.95 45.75,35.95 R16y.1 ; R8y.1 45.7,31.169 45.7,32.2 46.75,33.25 R12y.1
  other v2: 45.65,31.65
NetR5x_1: R5x.1 R6x.1 R7x.1 R8x.1 R17.1 R19.1 | length 19.7
  Top Layer w0.254: R8x.1 61.9,31.5 R7x.1 62.55,30.85 63.45,30.85 R6x.1 64.71,30.35 R5x.1 66.95,29.619 67.531,30.2 R19.1 R17.1
NetR6_1: R6.1 R8.1 R9x.1 R10x.1 R11x.1 R12x.1 | length 19.9
  Top Layer w0.254: R12x.1 60.15,32.15 60.55,32.55 61.8,32.55 62,32.35 R11x.1 63.35,32.35 63.95,32.95 64.75,32.95 65.45,33.65 75.55,33.65 R8.1 R6.1
NetR7_1: R7.1 R9.1 R13x.1 R14x.1 R15x.1 R16x.1 | length 34.9
  Top Layer w0.254: R13x.1@60.941,39 61.9,39 62.55,38.35 63.45,38.35 63.95,37.85 64.71,37.85 R16x.1 66.194,37.119 68.15,39.075 68.15,50.975 74.175,57 R9.1 R7.1
NetR8_2: R8.2 R10.2 U1.5 | length 7.6
  Top Layer w0.254: R8.2 R10.2 76.5,40.95 77.345,41.795 U1.5
NetR9_2: R9.2 R11.2 U1.3 | length 7.6
  Top Layer w0.254: R9.2 77.85,50.95 78.615,50.185 U1.3
NetR12_1: R12.1 R13.2 R17.2 U2.2 | length 7.3
  Top Layer w0.254: U2.2 79.6,21.415 R17.2
NetR14_1: R14.1 R15.2 R16.2 U2.6 | length 7.2
  Top Layer w0.254: R16.2@78.315,9.35 78.315,13.15 U2.6
NetR18_2: R18.2 R20.2 U2.5 | length 7.6
  Top Layer w0.254: R18.2 R20.2 76.2,14.15 77.045,14.995 U2.5
NetR19_2: R19.2 R21.2 U2.3 | length 7.6
  Top Layer w0.254: R19.2 77.55,24.15 78.315,23.385 U2.3
NetR22_1: R22.1 R23.2 R27.2 U3.6 | length 7.2
  Top Layer w0.254: U3.6 60.15,56.515 R27.2@63.95,56.515
NetR24_1: R24.1 R25.2 R32.2 U4.2 | length 7.3
  Top Layer w0.254: R32.2 24.316,57.7 U4.2
NetR26_1: R26.1 R29.2 R31.2 U4.6 | length 7.2
  Top Layer w0.254: U4.6 32.581,56.415 R31.2@36.381,56.415
NetR30_2: R30.2 R34.2 U3.5 | length 7.6
  Top Layer w0.254: U3.5 58.305,55.245 59.15,54.4 R34.2 R30.2
NetR35_2: R35.2 R38.2 U4.5 | length 7.6
  Top Layer w0.254: U4.5 30.736,55.145 31.581,54.3 R38.2 R35.2
NetR36_2: R36.2 R39.2 U4.3 | length 7.6
  Top Layer w0.254: R36.2 21.581,55.65 22.346,56.415 U4.3
NetR37_2: R37.2 R40.2 U3.3 | length 7.6
  Top Layer w0.254: R37.2 49.15,55.75 49.915,56.515 U3.3
NetR41_1: R41.1 R46.1 R47.2 U6.6 | length 10
  Top Layer w0.254: R41.1 R47.2 118.125,46.485 U6.6 ; R46.1 R41.1@118.14,40.335
NetR42_1: R42.1 R43.2 R48.2 U5.1 | length 32.4
  Top Layer w0.254: R42.1 19.855,99.25 20.1,99.005 U5.1 ; U5.1@22.05,99.03 22.05,102.85 v1@23.6,104.4 ; v1@35.25,104.4 38.45,101.2 R43.2@38.45,96.49 ; R48.2 R43.2
  Bottom Layer w0.254: v1(23.6,104.35) v1@35.185,104.35
  other v1: 35.235,104.4
NetR42_2: R42.2 RY1A.1 RY2A.1 RY3A.1 RY4A.1 U5.2 | length 75.1
  Top Layer w0.254: R42.2@18.35,97.825 16.55,96.025 16.55,87.5 18.7,85.35 24.4,85.35 ; R42.2 18.515,97.735 U5.2 ; RY1A.1@22.95,81.1 22.95,83.9 24.4,85.35 ; RY2A.1@31.85,81.1 31.85,84.15 30.65,85.35 ; RY3A.1@49.605,81.1 49.605,84.495 48.75,85.35 ; RY4A.1@58.505,81.1 58.505,83.895 57.05,85.35 48.75,85.35 ; 24.4,85.35 30.65,85.35 ; 30.65,85.35 48.75,85.35
NetR43_1: R43.1 R44.2 R68.1 U5.6 | length 10
  Top Layer w0.254: U5.6 26.965,96.45 R44.2 R68.1 ; R68.1@33.115,96.465 R43.1
NetR45_1: R45.1 R46.2 R50.2 U6.1 | length 32.4
  Top Layer w0.254: R50.2 R46.2 122.85,35 v1@126.05,38.2 ; R45.1 120.925,53.595 120.68,53.35 U6.1 124.5,51.4 v1@126.05,49.85
  Bottom Layer w0.254: v1@126,38.265 v1(126,49.85)
  other v1: 126.05,38.215
NetR45_2: R45.2 RX1A.1 RX2A.1 RX3A.1 RX4A.1 U6.2 | length 75.4
  Top Layer w0.254: RX4A.1 105.495,14.795 106.95,16.25 106.95,24.55 ; RX3A.1 106.095,23.695 106.95,24.55 ; RX2A.1 105.75,41.45 106.95,42.65 ; RX1A.1 105.5,50.35 106.95,48.9 ; U6.2 119.41,54.935 R45.2 117.225,57.15 109.5,57.15 106.95,54.6 106.95,48.9 ; 106.95,24.55 106.95,42.65 ; 106.95,42.65 106.95,48.9
NetR52_1: R52.1 U5.3 | length 3.6
  Top Layer w0.254: R52.1 18.515,96.465 U5.3
NetR53_1: R53.1 U6.3 | length 3.6
  Top Layer w0.254: R53.1 118.14,54.935 U6.3
NetR54_1: R54.1 R57.1 R58.2 U7.6 | length 10
  Top Layer w0.254: U7.6 54.09,96.4 R58.2 R54.1 ; R54.1@60.24,96.415 R57.1
NetR55_1: R55.1 R60.1 R61.2 U8.6 | length 10
  Top Layer w0.254: R55.1 R61.2 118.075,19.36 U8.6 ; R60.1 R55.1@118.09,13.21
NetR56_1: R56.1 R57.2 R62.2 U7.1 | length 32.4
  Top Layer w0.254: R56.1 46.98,99.2 47.225,98.955 U7.1 ; U7.1@49.2,98.93 49.2,102.75 v1@50.75,104.3 ; v1@62.4,104.3 65.6,101.1 R57.2@65.6,96.39 ; R62.2 R57.2
  Bottom Layer w0.254: v1(50.75,104.25) v1@62.335,104.25
  other v1: 62.385,104.3
NetR56_2: R56.2 RY1B.1 RY2B.1 RY3B.1 RY4B.1 U7.2 | length 60
  Top Layer w0.254: RY1B.1 RY2B.1 ; RY1B.1@25.917,81.1 28.883,81.1 28.883,82.833 v1(29.4,83.35) v1@29.45,83.4 ; v1@42.35,90.05 42.35,95.95 44.1,97.7 R56.2 45.64,97.685 U7.2 ; v1@51.85,83.45 52.572,82.728 52.572,81.1 RY4B.1@55.538,81.1 ; RY3B.1 RY4B.1
  Bottom Layer w0.254: v1(29.4,83.35) 43.35,83.35 ; v1(42.393,90.1) 42.393,84.307 43.35,83.35 ; v1(51.75,83.45) 51.65,83.35 43.35,83.35
NetR59_1: R59.1 R60.2 R64.2 U8.1 | length 32.4
  Top Layer w0.254: R64.2 R60.2 ; R60.2@118.09,7.95 122.8,7.95 v1@126,11.15 ; U8.1 120.63,26.225 120.875,26.47 R59.1 ; U8.1@120.63,24.35 124.45,24.35 v1@126,22.8
  Bottom Layer w0.254: v1@125.95,11.215 v1(125.95,22.8)
  other v1: 126,11.165
NetR59_2: R59.2 RX1B.1 RX2B.1 RX3B.1 RX4B.1 U8.2 | length 54.1
  Top Layer w0.254: RX4B.1 RX3B.1 104.328,20.728 v1@105.05,21.45 ; RX1B.1 RX2B.1 104.433,44.417 v1(104.95,43.9) v1@105,43.85 ; v1@111.7,31.125 117.6,31.125 119.35,29.375 R59.2@119.35,27.85 ; U8.2 119.36,27.81 R59.2
  Bottom Layer w0.254: v1(104.95,43.9) 104.95,21.65 v1(105.05,21.55) ; 105,30.125 105.957,31.082 v1(111.75,31.082)
NetR66_1: R66.1 U7.3 | length 3.6
  Top Layer w0.254: R66.1 45.64,96.415 U7.3
NetR67_1: R67.1 U8.3 | length 3.6
  Top Layer w0.254: R67.1 118.09,27.81 U8.3
pads on no net: J1.2 P3.3 R13g.1

## Polygon pours and split planes (outlines as drawn)
70_GND on Bottom Layer "70_gnd_bot" (solid, remove dead copper, pour order 4): 57.65,47.65 57.65,40.15 67.15,40.15 67.15,47.65 57.65,47.65
GND on Bottom Layer "gnd_bot" (solid, remove dead copper, pour order 9): 0,118.6 0,0.65 141.65,0.65 141.65,118.65 0,118.65
GND on Top Layer "gnd_top" (solid, remove dead copper, pour order 11): 0,118.65 0,0.65 141.65,0.65 141.65,118.65 0,118.65

## Other copper
Top Layer:
  text "S11830_1_SiPM" at 73.15,63.55 h3

## Silkscreen, mask and mechanical layers (free items; w line width, h text height)
Top Overlay:
  lines w0.254: 5.816,26.185 5.816,39.65 40.046,39.65 43.046,42.65 49.65,42.65 ; 5.851,26.15 40.031,26.15 43.031,23.15 49.616,23.15 ; 20.116,26.166 20.116,39.65 ; 3.316,23.6 22.566,23.6 22.616,23.65 22.616,42.15 3.351,42.15 3.316,42.185 3.316,23.6
Drill Drawing:
  the board outline again, w0.254

## Text inside footprints (layer, text, board x,y; h text height)
J1: Top Overlay "30" at 57.541,26.719 h1.5 r270; Top Overlay "1" at 56.85,42 h1.5 r270
P1: Top Overlay "3" at 51.858,18.6 h1.27 r90; Top Overlay "4" at 48.326,18.514 h1.27 r90; Top Overlay "2" at 48.326,11.91 h1.27 r90; Top Overlay "1" at 50.866,12.418 h1.27 r90